# EAGLE board P32 Main (EAGLE 5.06)
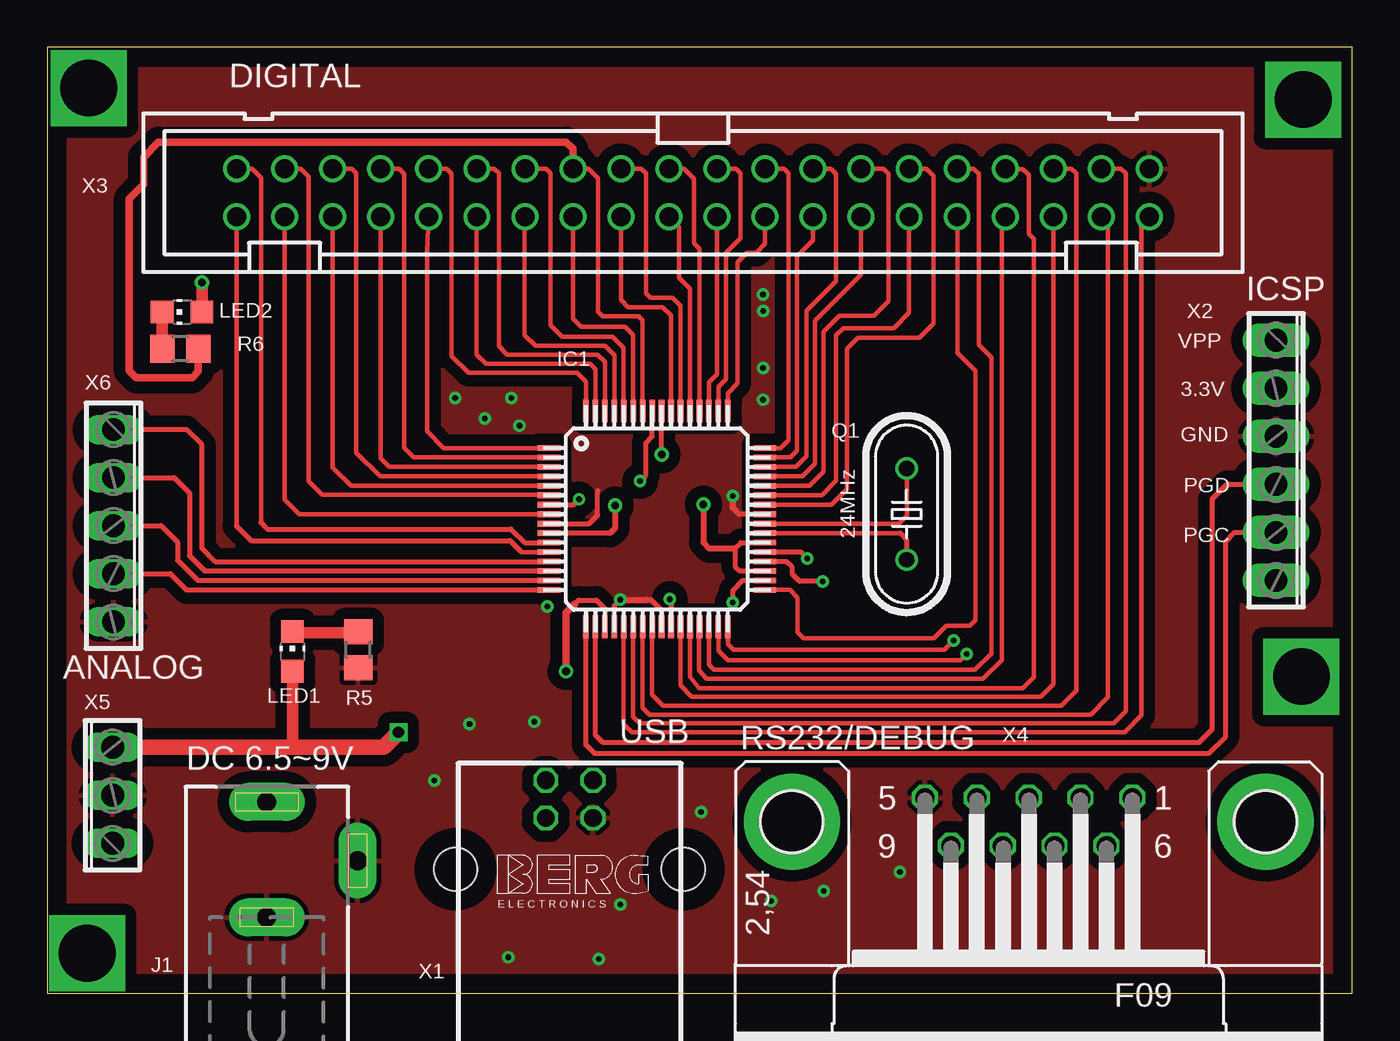
[diagram p0: board, top side]
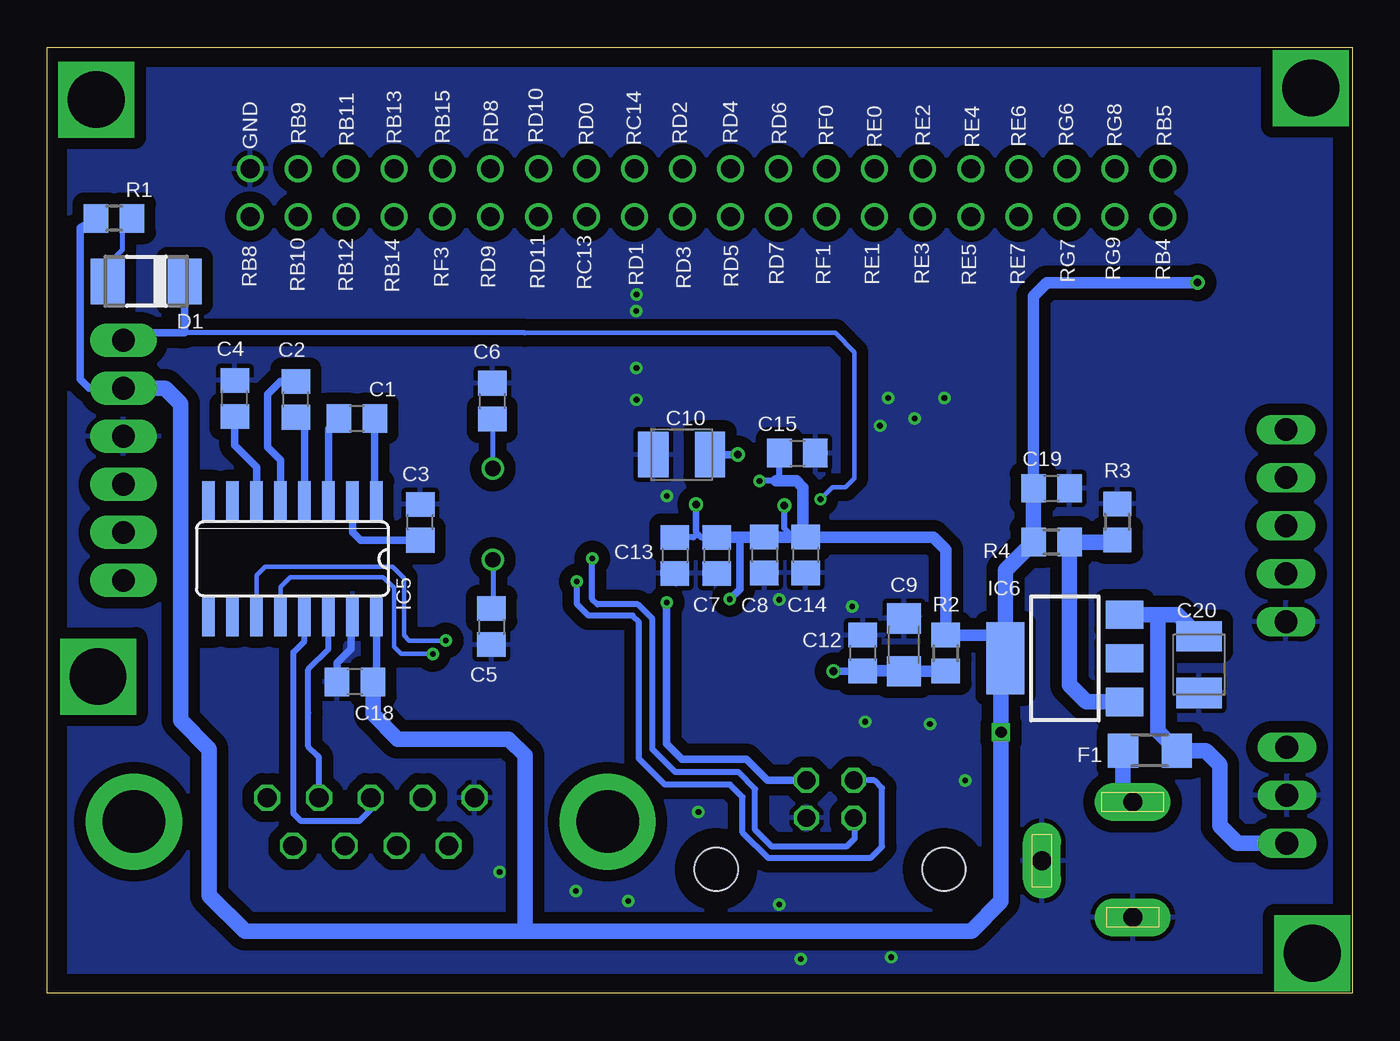
[diagram p1: board, bottom side, seen from below]

Size 69 x 50 mm. Coordinates in mm from the lower left corner, seen from the top.
Outline: 0,0 69,0 69,50 0,50 0,0
Copper layers (1*16): Top 0.035mm / dielectric 1.5mm / Bottom 0.035mm
Design rules "default *": minimum track width 0.2261mm, minimum drill 0.3mm, track to track 9mil, track to pad 0.1981mm, pad to pad 0.1981mm, via to via 9mil, smd to smd 8mil, copper to edge 40mil, drill to drill 8mil, minimum pad ring 7mil, minimum via ring 7mil, stop-mask expansion 4mil, vias tented up to drill 0mil, thermal gap 10mil

## Footprints (pad centres in the part's own frame; a part is rotated, then mirrored left to right if it is on the bottom)
C0805 = smd 1.3 x 1.5: 1 -0.95,0; 2 0.95,0
C1206 = smd 1.6 x 1.8: 1 -1.4,0; 2 1.4,0
SMC_B = smd 1.6 x 2.4: + -1.5,0; - 1.5,0
DO-214AC = smd 1.8 x 2.4: A 2.025,0; C -2.025,0
R1206 = smd 1.6 x 1.803: 1 -1.422,0; 2 1.422,0
TQFP64-10X10 = smd 1.2 x 0.3: 1 -5.7,3.75; 2 -5.7,3.25; 3 -5.7,2.75; 4 -5.7,2.25; 5 -5.7,1.75; 6 -5.7,1.25; 7 -5.7,0.75; 8 -5.7,0.25; 9 -5.7,-0.25; 10 -5.7,-0.75; 11 -5.7,-1.25; 12 -5.7,-1.75; 13 -5.7,-2.25; 14 -5.7,-2.75; 15 -5.7,-3.25; 16 -5.7,-3.75; 33 5.7,-3.75; 34 5.7,-3.25; 35 5.7,-2.75; 36 5.7,-2.25; 37 5.7,-1.75; 38 5.7,-1.25; 39 5.7,-0.75; 40 5.7,-0.25; 41 5.7,0.25; 42 5.7,0.75; 43 5.7,1.25; 44 5.7,1.75; 45 5.7,2.25; 46 5.7,2.75; 47 5.7,3.25; 48 5.7,3.75 | smd 0.3 x 1.2: 17 -3.75,-5.7; 18 -3.25,-5.7; 19 -2.75,-5.7; 20 -2.25,-5.7; 21 -1.75,-5.7; 22 -1.25,-5.7; 23 -0.75,-5.7; 24 -0.25,-5.7; 25 0.25,-5.7; 26 0.75,-5.7; 27 1.25,-5.7; 28 1.75,-5.7; 29 2.25,-5.7; 30 2.75,-5.7; 31 3.25,-5.7; 32 3.75,-5.7; 49 3.75,5.7; 50 3.25,5.7; 51 2.75,5.7; 52 2.25,5.7; 53 1.75,5.7; 54 1.25,5.7; 55 0.75,5.7; 56 0.25,5.7; 57 -0.25,5.7; 58 -0.75,5.7; 59 -1.25,5.7; 60 -1.75,5.7; 61 -2.25,5.7; 62 -2.75,5.7; 63 -3.25,5.7; 64 -3.75,5.7
SO16 = smd 0.66 x 2.032: 1 -4.445,-3.073; 2 -3.175,-3.073; 3 -1.905,-3.073; 4 -0.635,-3.073; 5 0.635,-3.073; 6 1.905,-3.073; 7 3.175,-3.073; 8 4.445,-3.073; 9 4.445,3.073; 10 3.175,3.073; 11 1.905,3.073; 12 0.635,3.073; 13 -0.635,3.073; 14 -1.905,3.073; 15 -3.175,3.073; 16 -4.445,3.073
SOT223 = smd 1.5 x 2: 1 -2.3,-3.15; 2 0,-3.15; 3 2.3,-3.15 | smd 3.8 x 2: 4 0,3.15
DCJ0202 = drill 1 pad 2 long: 1 0,3.1; 2 4.8,0; 3 0,-3
CHIP-LED0805 = smd 1.2 x 1.2: A 0,-1.05; C 0,1.05
HC49/S = drill 0.813 round: 1 -2.413,0; 2 2.413,0
R0805 = smd 1.3 x 1.5: 1 -0.95,0; 2 0.95,0
PN61729 = drill 0.95 octagon: 1 1.25,4.71; 2 -1.25,4.71; 3 -1.25,2.71; 4 1.25,2.71 | hole 2.3: -6.02,0; 6.02,0
6POL254 = drill 1.2 pad 1.778 long: 1 -6.35,0; 2 -3.81,0; 3 -1.27,0; 4 1.27,0; 5 3.81,0; 6 6.35,0
PAK100/2500-40 = drill 1 pad 1.422 round: 1 -24.13,-1.27; 2 -24.13,1.27; 3 -21.59,-1.27; 4 -21.59,1.27; 5 -19.05,-1.27; 6 -19.05,1.27; 7 -16.51,-1.27; 8 -16.51,1.27; 9 -13.97,-1.27; 10 -13.97,1.27; 11 -11.43,-1.27; 12 -11.43,1.27; 13 -8.89,-1.27; 14 -8.89,1.27; 15 -6.35,-1.27; 16 -6.35,1.27; 17 -3.81,-1.27; 18 -3.81,1.27; 19 -1.27,-1.27; 20 -1.27,1.27; 21 1.27,-1.27; 22 1.27,1.27; 23 3.81,-1.27; 24 3.81,1.27; 25 6.35,-1.27; 26 6.35,1.27; 27 8.89,-1.27; 28 8.89,1.27; 29 11.43,-1.27; 30 11.43,1.27; 31 13.97,-1.27; 32 13.97,1.27; 33 16.51,-1.27; 34 16.51,1.27; 35 19.05,-1.27; 36 19.05,1.27; 37 21.59,-1.27; 38 21.59,1.27; 39 24.13,-1.27; 40 24.13,1.27
F09HP = drill 1.016 octagon: 1 -5.486,-1.27; 2 -2.743,-1.27; 3 0,-1.27; 4 2.743,-1.27; 5 5.486,-1.27; 6 -4.115,1.27; 7 -1.372,1.27; 8 1.372,1.27; 9 4.115,1.27 | drill 3.302 pad 5.08 round: G1 -12.522,0; G2 12.522,0
3POL254 = drill 1.2 long: 1 -2.54,0; 2 0,0; 3 2.54,0
5POL254 = drill 1.2 long: 1 -5.08,0; 2 -2.54,0; 3 0,0; 4 2.54,0; 5 5.08,0

## Placement (x,y rotation side)
C1  0.1uF  [C0805]  52.63,30.38 180 bottom
C2  0.1uF  [C0805]  55.85,31.39 90 bottom
C3  0.1uF  [C0805]  49.28,24.89 90 bottom
C4  0.1uF  [C0805]  59.08,31.45 90 bottom
C5  18pF  [C0805]  45.52,19.38 270 bottom
C6  18pF  [C0805]  45.47,31.29 90 bottom
C7  0.1uF  [C0805]  33.6,23.14 270 bottom
C8  0.1uF  [C0805]  31.09,23.16 270 bottom
C9  47uF  [C1206]  23.7,18.41 90 bottom
C10  10uF  [SMC_B]  35.46,28.47 180 bottom
C12  0.01uF  [C0805]  25.88,17.98 90 bottom
C13  0.1uF  [C0805]  35.81,23.14 270 bottom
C14  0.1uF  [C0805]  28.91,23.16 270 bottom
C15  0.1uF  [C0805]  29.34,28.55 0 bottom
C18  0.1uF  [C0805]  52.73,16.46 180 bottom
C19  1uF  [C0805]  15.9,26.7 0 bottom
C20  10uF  [SMC_B]  8.1,17.37 270 bottom
D1  1N4148 SOD323  [DO-214AC]  63.77,37.63 180 bottom
F1  500mA FUSE  [R1206]  10.69,12.83 0 bottom
IC1  PIC32MX440F256H  [TQFP64-10X10]  32.23,25.07 0 top
IC5  MAX3232CSE  [SO16]  56.03,22.96 180 bottom
IC6  LM317MBSTT3  [SOT223]  15.19,17.7 90 bottom
J1  DCJ0202  [DCJ0202]  11.61,7.01 0 top
LED1  [CHIP-LED0805]  12.97,18.06 0 top
LED2  [CHIP-LED0805]  7.13,36.01 90 top
Q1  [HC49/S]  45.44,25.32 90 top
R1  10K  [R0805]  65.47,40.95 180 bottom
R2  2E  [R0805]  21.49,17.98 90 bottom
R3  5K  [R0805]  12.42,24.92 270 bottom
R4  240E  [R0805]  15.9,23.85 180 bottom
R5  150E  [R0805]  16.44,18.16 90 top
R6  150E  [R0805]  7.04,34.06 180 top
X1  [PN61729]  27.61,6.55 0 top
X2  [6POL254]  64.97,28.17 270 top
X3  2540-  [PAK100/2500-40]  34.14,42.31 180 top
X4  [F09HP]  51.89,9.07 180 top
X5  [3POL254]  3.45,10.46 90 top
X6  [5POL254]  3.51,24.71 270 top

## Library data of the parts
C1-C10 C12-C15 C18-C20 F1 R1-R6 = rcl
D1 = diode
IC1 = microchip-6
IC5 = maxim
IC6 = v-reg
J1 = con-jack
LED1 LED2 = led
Q1 = crystal
X1 = con-berg
X2 X5 X6 = con-phoenix-254
X3 = con-3m
X4 = con-subd

## Nets
ANALOG-1: IC1.16 X6.4
ANALOG-2: IC1.15 X6.3
ANALOG-3: IC1.14 X6.2
ANALOG-4: IC1.13 X6.1
AVDD: C9.1 C12.1 IC1.19 R2.1
GND: C3.2 C4.2 C5.2 C6.2 C7.2 C8.2 C9.2 C10.- C12.2 C13.2 C14.2 C15.2 C18.2 C19.2 C20.- IC1.9 IC1.20 IC1.25 IC1.41 IC5.15 J1.2 J1.3 R3.1 R5.1 X1.4 X2.3 X3.1 X4.5 X5.2 X6.5
N$1: D1.A R1.1
N$2: C3.1 IC5.2
N$5: C4.1 IC5.6
N$6: C1.1 IC5.1
N$7: C1.2 IC5.3
N$9: C2.1 IC5.4
N$10: C2.2 IC5.5
N$12: IC6.1 R3.2 R4.1
N$13: IC5.14 X4.2
N$14: IC5.13 X4.3
N$15: LED1.C R5.2
N$16: LED2.C R6.2
N$17: F1.1 J1.1
N$100: C6.1 IC1.40 Q1.2
N$101: C5.1 IC1.39 Q1.1
PGC: IC1.17 X2.5
PGD: IC1.18 X2.4
RB4: IC1.12 X3.40
RB5: IC1.11 X3.39
RB8: IC1.21 X3.2
RB9: IC1.22 X3.3
RB14: IC1.29 X3.8
RB15: IC1.30 X3.9
RC13: IC1.47 X3.16
RC14: IC1.48 X3.17
RD0: IC1.46 X3.15
RD1: IC1.49 X3.18
RD2: IC1.50 X3.19
RD3: IC1.51 X3.20
RD4: IC1.52 X3.21
RD5: IC1.53 X3.22
RD6: IC1.54 X3.23
RD7: IC1.55 X3.24
RD8: IC1.42 X3.11
RD9: IC1.43 X3.12
RD10: IC1.44 X3.13
RD11: IC1.45 X3.14
RE0: IC1.60 X3.27
RE1: IC1.61 X3.28
RE2: IC1.62 X3.29
RE3: IC1.63 X3.30
RE4: IC1.64 X3.31
RE5: IC1.1 X3.32
RE6: IC1.2 X3.33
RE7: IC1.3 X3.34
RF0: IC1.58 R6.1 X3.25
RF1: IC1.59 X3.26
RF3: IC1.33 X3.10
RG6: IC1.4 X3.35
RG7: IC1.5 X3.36
RG8: IC1.6 X3.37
RG9: IC1.8 X3.38
TCK: IC1.27 X3.6
TDI: IC1.28 X3.7
TDO: IC1.24 X3.5
TMS: IC1.23 X3.4
U2RX: IC1.31 IC5.12
U2TX: IC1.32 IC5.11
USBDM: IC1.36 X1.2
USBDP: IC1.37 X1.3
VBUS: IC1.34 X1.1
VCC: C7.1 C8.1 C13.1 C14.1 C15.1 C18.1 C19.1 IC1.10 IC1.26 IC1.35 IC1.38 IC1.57 IC5.16 IC6.4 LED1.A LED2.A R1.2 R2.2 R4.2 X2.2 X5.3
VDC: C20.+ F1.2 IC6.3 X5.1
VDDCORE: C10.+ IC1.56
VPP: D1.C IC1.7 X2.1

## Tracks (layer width: path | path; a pad name or v marks a point on that pad's centre or on a via)
ANALOG-1
  Top 0.254: IC1.16 7.36,21.32 6.5,22.17 X6.4
ANALOG-2
  Top 0.254: IC1.15 7.95,21.82 6.88,22.89 6.88,23.85 6.02,24.71 X6.3
ANALOG-3
  Top 0.254: IC1.14 8.31,22.32 7.52,23.11 7.52,26.44 6.71,27.25 X6.2
ANALOG-4
  Top 0.254: X6.1 7.37,29.79 8.18,28.98 8.18,23.52 8.88,22.82 IC1.13
AVDD  (via drill 0.4)
  Top 0.254: IC1.19 29.48,20.33 29.03,20.78 28.09,20.78 27.89,20.57
  Top 0.406: v27.43,17.02 27.43,20.12 27.89,20.57
  Bottom 0.406: v27.43,17.02 26.46,17.02 C12.1
  Bottom 0.61: C12.1 24.05,17.03 C9.1 21.51,17.02 R2.1
GND  (via drill 0.3)
  Top 0.254: IC1.9 28.66,24.82 29.11,25.27 29.11,26.57 | IC1.20 29.98,20.48 v30.3,20.8 | IC1.25 32.48,20.02 32.48,20.23 31.91,20.8 31.7,20.8 | IC1.41 36.58,25.32
  Top 0.305: v30.3,20.8 31.7,20.8 | 36.58,25.32 36.25,25.65 v36.25,26.29
  Bottom 0.406: C18.2 53.68,17.46 52.93,18.21 52.93,19.81 IC5.15
  other vias: 26.44,20.45 37.85,33.05 37.85,31.37 37.84,36.93 37.86,36.06 21.56,31.47 24.54,31.47 23.14,30.38 24.97,30 41.05,5.41 45.09,6.4 38.28,4.88 34.57,9.58 20.46,11.25 30.3,4.7 24.38,1.91 29.16,1.8 22.33,14.22 25.76,14.35
  pour Top (isolate 0.61): 0.38,49.02 68.22,49.11 68.22,0.47 0.43,0.25
  pour Bottom (isolate 0.61): 0.38,49.02 68.22,49.11 68.22,0.49 0.43,0.25
N$1
  Bottom 0.254: R1.1 65.02,40.81 65.02,39.32 65.79,38.55 D1.A 66.34,37.86
N$2
  Bottom 0.406: C3.1 52.44,23.94 52.86,24.36 IC5.2
N$3  (via drill 3)
  other vias: 2.19,47.84
N$4  (via drill 3)
  other vias: 66.41,47.24
N$5
  Bottom 0.406: IC5.6 57.94,27.81 59.08,28.96 C4.1
N$6
  Bottom 0.406: C1.1 51.68,26.13 IC5.1
N$7
  Bottom 0.406: C1.2 54.13,29.83 IC5.3
N$8  (via drill 3)
  other vias: 66.31,16.74
N$9
  Bottom 0.406: C2.1 55.4,29.99 IC5.4
N$10
  Bottom 0.406: IC5.5 56.67,28.17 57.35,28.85 57.35,31.65 56.66,32.34 C2.2
N$11  (via drill 3)
  other vias: 2.11,2.11
N$12
  Bottom 0.61: 12.54,23.85 R3.2
  Bottom 0.813: 12.54,23.85 R4.1 14.95,16.3 14.06,15.4 IC6.1
N$13
  Bottom 0.305: IC5.14 54.13,18.44 54.13,18.19 55.19,17.12 55.19,14.81 55.19,13.03 54.74,12.57 54.63,12.47 X4.2
N$14
  Bottom 0.305: X4.3 51.89,9.7 52.5,9.09 55.58,9.09 55.98,9.5 55.98,18.03 55.4,18.62 IC5.13
N$15
  Top 0.61: LED1.C 13.22,19.11 13.29,19.05 16.38,19.05 R5.2
N$16
  Top 0.61: LED2.C 6.08,34.07 R6.2
N$17
  Bottom 0.813: J1.1 12.12,10.62 F1.1
N$100
  Top 0.229: IC1.40 45.04,24.82 45.47,25.25 45.47,26.62 Q1.2
  Bottom 0.254: C6.1 45.44,30.32 Q1.2
N$101
  Top 0.229: IC1.39 45.1,24.32
  Top 0.254: 45.1,24.32 45.44,23.98 Q1.1
  Bottom 0.254: C5.1 45.44,20.41 Q1.1
PGC
  Top 0.254: IC1.17 28.48,13.12 28.93,12.68 61.42,12.68 62.31,13.56 62.31,23.88 62.79,24.36 X2.5
PGD
  Top 0.254: IC1.18 28.98,13.64 29.36,13.26 60.91,13.26 61.59,13.95 61.59,26.14 62.36,26.9 X2.4
RB4
  Top 0.229: 10.01,24.69 X3.40 | IC1.12 25.07,23.32 25.04,23.34
  Top 0.254: 25.04,23.34 24.46,23.93 10.78,23.93 10.01,24.69
RB5
  Top 0.229: X3.39 10.83,43.58 11.3,43.1 11.3,24.87
  Top 0.254: IC1.11 25.25,23.82 24.54,24.54 11.63,24.54 11.3,24.87
RB8
  Top 0.229: X3.2 57.86,40.63 57.86,14.68 56.97,13.79 30.91,13.79 30.48,14.22 IC1.21
RB9
  Top 0.229: X3.3 56.77,43.58 57.02,43.33 57.02,14.91 56.39,14.28 31.32,14.28 30.98,14.61 IC1.22
RB14
  Top 0.229: IC1.29 34.48,19.34 34.47,19.33 34.47,17.07 34.85,16.61 49.48,16.61 50.47,17.6 50.47,40.86 X3.8
RB15
  Top 0.229: IC1.30 34.98,17.37 35.26,17.09 49.05,17.09 49.91,17.96 49.91,33.6 49.25,34.27 49.25,43.31 48.98,43.58 X3.9
RC13
  Top 0.229: IC1.47 39.29,28.32 39.65,28.68 39.65,38.96 40.46,39.78 arc90 40.49,39.81 X3.16
RC14
  Top 0.229: X3.17 38.94,43.58 39.19,43.33 39.19,29.23 38.78,28.82 IC1.48
RD0
  Top 0.229: IC1.46 39.58,27.82 40.13,28.37 40.13,36.07 41.71,37.64 41.71,43.31 41.43,43.58 X3.15
RD1
  Top 0.229: X3.18 37.95,39.6 37.49,39.14 37.01,39.14 36.5,38.63 36.5,32.23 35.98,31.71 IC1.49
RD2
  Top 0.229: IC1.50 35.48,32.05 35.89,32.46 35.89,39.14 36.65,39.9 36.65,43.33 36.4,43.58 X3.19
RD3
  Top 0.229: X3.20 35.41,32.72 34.98,32.29 IC1.51
RD4
  Top 0.229: X3.21 33.66,43.58 34.19,43.05 34.19,39.65 34.48,39.35 IC1.52
RD5
  Top 0.229: IC1.53 33.98,37.24 33.4,37.82 33.4,40.51 X3.22
RD6
  Top 0.229: X3.23 31.4,43.58 31.65,43.33 31.65,37.01 31.9,36.75 33.07,36.75 33.48,36.34 IC1.54
RD7
  Top 0.229: X3.24 30.33,36.65 30.71,36.27 32.54,36.27 32.98,35.83 IC1.55
RD8
  Top 0.229: IC1.42 41.47,25.82 42.29,26.64 42.29,34.06 42.88,34.65 46.13,34.65 46.86,35.38 46.86,43.2 46.49,43.58 X3.11
RD9
  Top 0.229: IC1.43 40.95,26.32 41.71,27.08 41.71,34.77 42.09,35.15 44.76,35.15 45.57,35.97 X3.12
RD10
  Top 0.229: IC1.44 40.31,26.82 41.05,27.56 41.05,34.98 41.88,35.81 43.71,35.81 44.48,36.58 44.48,43.31 44.2,43.58 X3.13
RD11
  Top 0.229: IC1.45 39.92,27.32 40.59,27.99 40.59,35.53 43.03,37.98 X3.14
RE0
  Top 0.229: X3.27 26.37,43.58 26.62,43.33 26.62,35.31 27.23,34.7 29.9,34.7 30.48,34.11 IC1.60
RE1
  Top 0.229: IC1.61 29.98,33.72 29.49,34.21 25.81,34.21 25.25,34.77 X3.28
RE2
  Top 0.229: IC1.62 29.48,33.38 29.11,33.76 24.31,33.76 23.88,34.19 23.88,43.33 23.63,43.58 X3.29
RE3
  Top 0.229: X3.30 22.71,33.75 23.19,33.27 28.7,33.27 28.98,32.99 IC1.63
RE4
  Top 0.229: IC1.64 28.48,32.33 28.02,32.79 22.28,32.79 21.39,33.68 21.39,43.31 21.11,43.58 X3.31
RE5
  Top 0.229: IC1.1 20.96,28.82 20.09,29.69 20.09,39.23 X3.32
RE6
  Top 0.229: X3.33 18.6,43.58 18.87,43.31 18.87,28.83 19.38,28.32 IC1.2
RE7
  Top 0.229: X3.34 17.63,28.27 18.08,27.82 IC1.3
RF0
  Top 0.229: X3.25 28.63,43.58 29.13,43.08 29.13,36.02 29.36,35.79 31.27,35.79 31.48,35.57 IC1.58
  Top 0.406: R6.1 7.99,32.87 7.65,32.53 4.71,32.53 4.34,32.9 4.34,42 5.08,42.75 5.08,44.2 5.88,44.99 27.43,44.99 27.79,44.63 X3.25
RF1
  Top 0.229: X3.26 27.79,35.66 28.22,35.23 30.56,35.23 30.98,34.8 IC1.59
RF3
  Top 0.229: IC1.33 39.26,21.32 39.67,20.9 39.67,19.07 39.98,18.77 46.89,18.77 47.42,19.3 47.55,19.43 48.79,19.43 49.07,19.71 49.07,32.89 48.11,33.85 X3.10
RG6
  Top 0.229: X3.35 16.08,43.58 16.33,43.33 16.33,28.57 17.59,27.32 IC1.4
RG7
  Top 0.229: X3.36 15.09,27.78 16.05,26.82 IC1.5
RG8
  Top 0.229: X3.37 13.39,43.58 13.82,43.16 13.82,27.05 14.53,26.34 26.51,26.34 IC1.6
RG9
  Top 0.229: X3.38 12.55,26.08 13.31,25.32 IC1.8
TCK
  Top 0.229: IC1.27 33.48,16.28 34.06,15.67 52.53,15.67 53.19,16.34 X3.6
TDI
  Top 0.229: IC1.28 33.98,16.72 34.47,16.13 51.59,16.13 52.17,16.71 52.17,39.88 51.89,40.16 51.89,43.26 51.59,43.56 50.67,43.56 X3.7
TDO
  Top 0.229: IC1.24 31.98,15.77 32.56,15.19 53.62,15.19 54.41,15.98 54.41,43.33 54.16,43.58 X3.5
TMS
  Top 0.229: X3.4 56.08,40.69 56.08,15.65 55.17,14.73 31.85,14.73 31.48,15.1 IC1.23
U2RX  (via drill 0.3)
  Top 0.229: IC1.31 35.48,18.11 35.99,17.6 48.28,17.6 v48.62,17.93
  Bottom 0.229: v48.62,17.93 50.29,17.93 50.67,18.31 50.67,21.44 51.23,22 56.16,22 56.67,21.49 IC5.12
U2TX  (via drill 0.3)
  Top 0.229: IC1.32 35.98,18.45 36.27,18.16 47.45,18.16 v47.93,18.64
  Bottom 0.229: IC5.11 57.94,22.1 57.48,22.55 50.75,22.55 50.14,21.95 50.14,18.92 49.86,18.64 v47.93,18.64
USBDM  (via drill 0.3)
  Top 0.254: IC1.36 39.08,22.82 39.4,22.5 39.4,22.15 39.78,21.77 v41,21.77
  Bottom 0.305: v41,21.77 41,20.57 40.39,19.96 38.05,19.96 37.72,19.63 37.72,12.39 36.35,11.02 32.89,11.02 32.23,10.36 32.23,8.49 30.88,7.14 25.48,7.14 24.87,7.75 24.87,10.85 25.27,11.25 X1.2
USBDP  (via drill 0.3)
  Top 0.254: IC1.37 39.85,23.32 v40.18,22.99
  Bottom 0.305: v40.18,22.99 40.18,20.83 39.9,20.55 37.77,20.55 37.01,19.79 37.01,12.9 35.79,11.68 32.46,11.68 31.57,10.79 31.57,8.64 30.68,7.75 26.75,7.75 26.31,8.18 26.31,9.22 X1.3
VBUS  (via drill 0.3)
  Top 0.254: v36.25,20.65 36.25,21.29 36.78,21.82 IC1.34
  Bottom 0.406: X1.1 30.92,11.26 32.03,12.37 35.43,12.37 36.25,13.18 v36.25,20.65
VCC  (via drill 0.3, 0.4, 0.6)
  Top 0.254: IC1.57 31.98,29.42 31.65,29.08 31.65,27.38 v31.34,27.08 | 29.75,24.32 IC1.10 | IC1.38 36.67,23.82 36.37,23.52 36.37,22.55 36.61,22.32 IC1.35 | 32.98,20.76 IC1.26
  Top 0.305: 29.75,24.32 30.02,24.59 v30.02,25.78 | 36.37,23.52 35,23.52 34.7,23.82 v34.7,25.83 | v32.92,20.83 32.98,20.76
  Top 0.61: LED1.A 12.97,13.12 13.09,13.01 | LED2.A v8.18,37.56
  Top 0.813: X5.3 13.09,13.01 17.78,13.01 v18.57,13.79
  Bottom 0.254: 29.55,24.11 30.02,24.59
  Bottom 0.305: v31.34,27.08 30.48,27.08 30.29,27.27 C15.1 | 30.02,24.59 v30.02,25.78 | C14.1 29.55,24.11 | 28.89,24.11 28.88,24.11 | C13.1 34.84,24.09 34.7,24.23 v34.7,25.83 34.7,24.36 34.43,24.09 C7.1 33.57,24.05
  Bottom 0.406: IC5.16 51.59,16.65 C18.1 | 32.16,24.11 32.38,23.89 32.38,21.36 v32.92,20.83 | X2.2 66.78,31.98 67.26,32.46 67.26,40.47 R1.2
  Bottom 0.61: 18.34,18.52 18.76,18.93 R2.2 21.49,23.44 22.15,24.11 28.89,24.11 C14.1 | C14.1 C8.1 32.16,24.11 33.58,24.11 C7.1 | 30.48,27.08 29.39,27.08 29.03,26.72 29.03,24.24 C14.1 | v8.18,37.56 16.14,37.56 16.85,36.85 C19.1
  Bottom 0.813: C19.1 R4.2 18.34,22.36 18.34,18.52 IC6.4 18.73,17.31 18.57,17.14 v18.57,13.79 18.57,4.85 20.14,3.28 43.61,3.28 | X2.2 62.76,31.98 61.95,31.17 61.95,14.43 60.43,12.9 60.43,5.16 58.55,3.28 43.61,3.28 | C18.1 51.78,14.75 50.47,13.44 44.6,13.44 43.74,12.57 43.74,3.4 43.61,3.28
VDC
  Bottom 0.813: C20.+ 9.23,20 10.29,20 | 10.29,20 IC6.3 | 10.29,20 10.29,13.84 F1.2 7.75,12.83 7.01,12.09 7.01,8.87 6.07,7.92 X5.1
VDDCORE  (via drill 0.4)
  Top 0.254: IC1.56 v32.48,28.48 v32.49,28.47
  Bottom 0.406: v32.49,28.47 C10.+
VPP  (via drill 0.3)
  Top 0.254: IC1.7 27.83,25.82 v28.12,26.11
  Bottom 0.229: 43.74,34.9 27.33,34.9 26.31,33.88 26.31,27.23 26.8,26.75 27.48,26.75 v28.12,26.11
  Bottom 0.254: 43.74,34.9 61.94,34.9
  Bottom 0.406: X2.1 64.59,34.9 61.94,34.9 61.74,34.9 D1.C

## Text on the board
tNames: DIGITAL | ICSP | VPP | 3.3V | GND | PGD | 24MHz | PGC | ANALOG | DC 6.5~9V | USB | RS232/DEBUG
bNames: RC14 | RD10 | RB15 | RB13 | RB11 | RB5 | RG8 | RG6 | RE6 | RE4 | RE2 | RE0 | RF0 | RD6 | RD4 | RD2 | RD0 | RD8 | RB9 | GND | RB4 | RG9 | RG7 | RE7 | RE5 | RE3 | RE1 | RF1 | RD7 | RD5 | RD3 | RD1 | RC13 | RD11 | RD9 | RF3 | RB14 | RB12 | RB10 | RB8